# EAGLE board olhos_5V_reduzido (EAGLE 9.6.2)
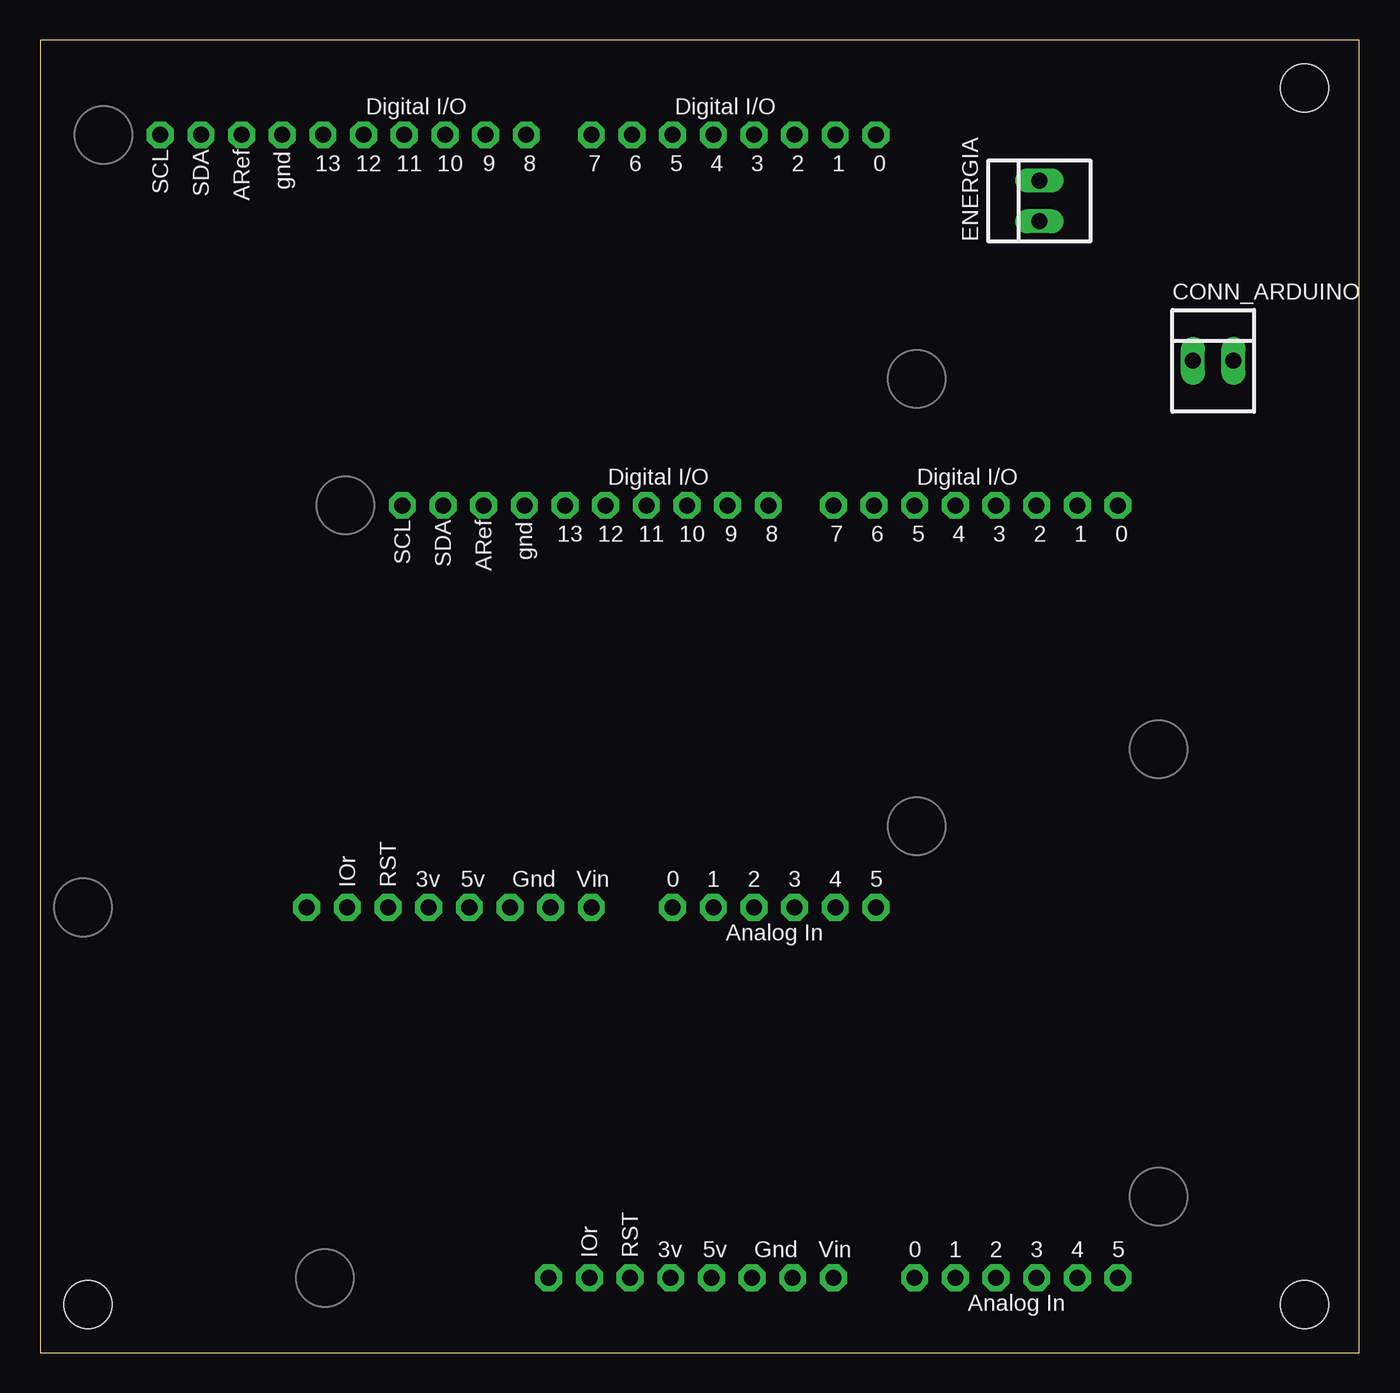
[diagram p0: board, top side]
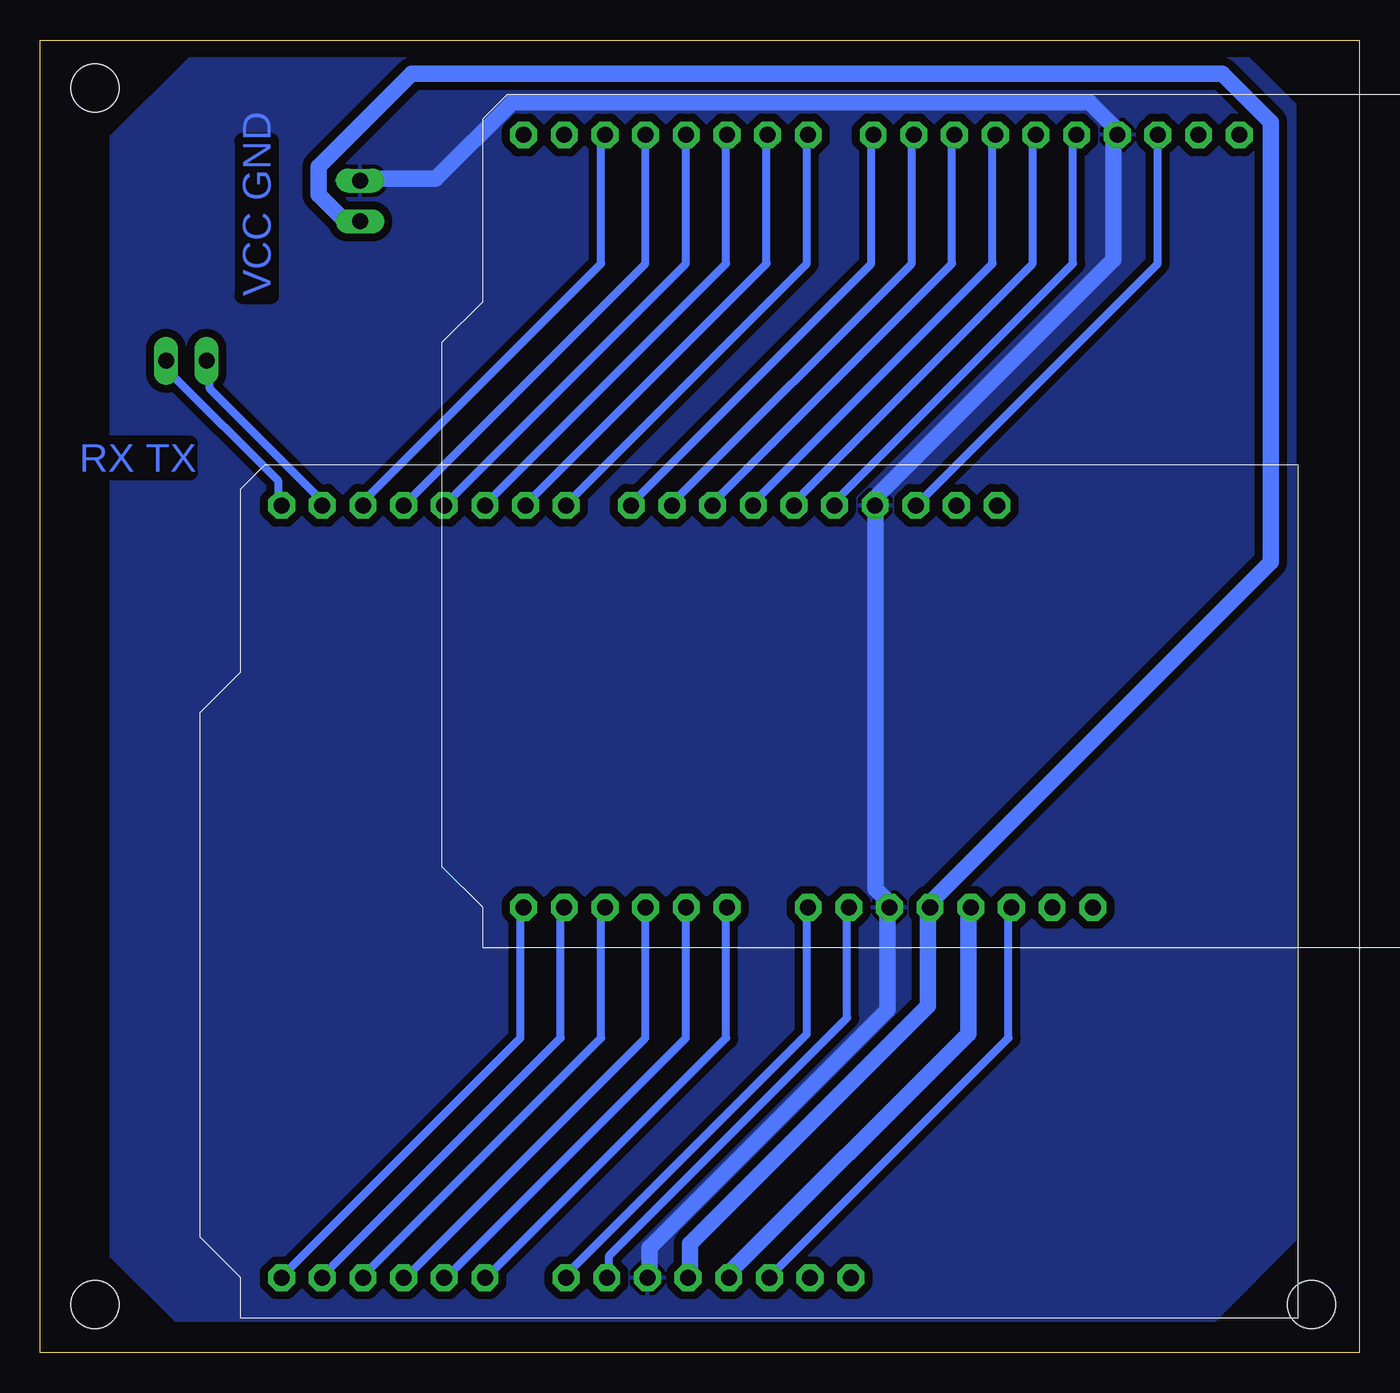
[diagram p1: board, bottom side, seen from below]

Size 82.43 x 82 mm. Coordinates in mm from the lower left corner, seen from the top.
Outline: 0,0 82.43,0 82.43,82 0,82 0,0
Copper layers (1*16): Top 0.035mm / dielectric 1.5mm / Bottom 0.035mm
Design rules "default": minimum track width 6mil, minimum drill 0.35mm, track to track 6mil, track to pad 6mil, pad to pad 6mil, via to via 6mil, smd to smd 6mil, copper to edge 40mil, drill to drill 6mil, minimum pad ring 10mil, minimum via ring 8mil, stop-mask expansion 4mil, vias tented up to drill 0mil, thermal gap 10mil
Net classes: 0 default: width 0.508 mm, clearance 0.5 mm; 1 ENERGIA: width 1.016 mm, clearance 0.5 mm
Holes 3 mm at 3,3 79,3 79,79

## Footprints (pad centres in the part's own frame; a part is rotated, then mirrored left to right if it is on the bottom)
22-23-2021 = drill 1 long: 1 -1.27,0; 2 1.27,0
ARDUINOR3-BPLACE = drill 1 pad 1.676 octagon: 3V 35.56,2.54; 5V 38.1,2.54; A0 50.8,2.54; A1 53.34,2.54; A2 55.88,2.54; A3 58.42,2.54; A4 60.96,2.54; A5 63.5,2.54; AREF 23.876,50.8; D0 63.5,50.8; D1 60.96,50.8; D2 58.42,50.8; D3 55.88,50.8; D4 53.34,50.8; D5 50.8,50.8; D6 48.26,50.8; D7 45.72,50.8; D8 41.656,50.8; D9 39.116,50.8; D10 36.576,50.8; D11 34.036,50.8; D12 31.496,50.8; D13 28.956,50.8; GND 26.416,50.8; GND1 43.18,2.54; GND2 40.64,2.54; IOREF 30.48,2.54; RESERVED 27.94,2.54; RESET 33.02,2.54; SCL 18.796,50.8; SDA 21.336,50.8; VIN 45.72,2.54

## Placement (x,y rotation side)
CONN_ARDUINO  22-23-2021  [22-23-2021]  73.29,61.96 0 top
ENERGIA  22-23-2021  [22-23-2021]  62.43,71.95 90 top
TELA_LCD  ARDUINOR3-BPLACE  [ARDUINOR3-BPLACE]  -11.28,25.27 0 top
U2  ARDUINOR3-BPLACE  [ARDUINOR3-BPLACE]  3.84,2.13 0 top

## Library data of the parts
CONN_ARDUINO ENERGIA = con-molex; MF: MOLEX; MPN: 22-23-2021; OC_FARNELL: 1462926; OC_NEWARK: 25C3832
TELA_LCD U2 = adafruit

## Nets
3V [ENERGIA]: TELA_LCD.3V U2.3V
A0: TELA_LCD.A0 U2.A0
A1: TELA_LCD.A1 U2.A1
A2: TELA_LCD.A2 U2.A2
A3: TELA_LCD.A3 U2.A3
A4: TELA_LCD.A4 U2.A4
A5: TELA_LCD.A5 U2.A5
GND [ENERGIA]: ENERGIA.2 TELA_LCD.GND TELA_LCD.GND2 U2.GND U2.GND2
GND1: TELA_LCD.GND1 U2.GND1
N$1: TELA_LCD.D2 U2.D2
N$2: TELA_LCD.D3 U2.D3
N$3: TELA_LCD.D4 U2.D4
N$4: TELA_LCD.D5 U2.D5
N$5: TELA_LCD.D6 U2.D6
N$6: TELA_LCD.D7 U2.D7
N$7: TELA_LCD.D8 U2.D8
N$8: TELA_LCD.D9 U2.D9
N$9: TELA_LCD.D10 U2.D10
N$10: TELA_LCD.D11 U2.D11
N$11: TELA_LCD.D12 U2.D12
N$12: TELA_LCD.D13 U2.D13
N$14: TELA_LCD.AREF U2.AREF
RESET: TELA_LCD.RESET U2.RESET
RX: CONN_ARDUINO.2 U2.D0
TX: CONN_ARDUINO.1 U2.D1
VCC [ENERGIA]: ENERGIA.1 TELA_LCD.5V U2.5V
VIN: TELA_LCD.VIN U2.VIN

## Tracks (layer width: path | path; a pad name or v marks a point on that pad's centre or on a via)
3V
  Bottom 1.016: TELA_LCD.3V 24.44,27.72 24.44,19.91 39.56,4.79 U2.3V
A0
  Bottom 0.508: TELA_LCD.A0 39.56,27.72 39.56,19.66 54.43,4.79 U2.A0
A1
  Bottom 0.508: TELA_LCD.A1 42.08,27.72 42.08,19.66 56.95,4.79 U2.A1
A2
  Bottom 0.508: TELA_LCD.A2 44.6,27.72 44.6,19.66 59.47,4.79 U2.A2
A3
  Bottom 0.508: TELA_LCD.A3 47.38,27.72 47.38,19.66 62.24,4.79 U2.A3
A4
  Bottom 0.508: TELA_LCD.A4 49.9,27.72 49.9,19.66 64.76,4.79 U2.A4
A5
  Bottom 0.508: TELA_LCD.A5 52.42,27.72 52.42,19.66 67.28,4.79 U2.A5
GND
  Bottom 1.016: ENERGIA.2 62.24,73.33 57.71,73.33 52.92,78.12 16.88,78.12 15.37,76.61 15.37,76.1 TELA_LCD.GND 15.37,75.6 15.37,68.29 30.24,53.42 U2.GND 30.24,52.92 30.24,28.98 29.48,28.22 TELA_LCD.GND2 29.48,27.72 29.48,21.42 44.35,6.55 44.35,4.79 U2.GND2
  pour Bottom: 9,2 4,7 4,78 6,80 7,81 73,81 78,76 78,6 74,2
GND1
  Bottom 0.508: TELA_LCD.GND1 32,27.72 32,20.92 46.87,6.05 46.87,4.79 U2.GND1
N$1
  Bottom 0.508: TELA_LCD.D2 47.38,75.85 47.38,68.04 62.24,53.17 U2.D2
N$2
  Bottom 0.508: TELA_LCD.D3 44.6,75.85 44.6,68.04 59.47,53.17 U2.D3
N$3
  Bottom 0.508: TELA_LCD.D4 42.08,75.85 42.08,68.04 56.95,53.17 U2.D4
N$4
  Bottom 0.508: TELA_LCD.D5 39.56,75.85 39.56,68.04 54.43,53.17 U2.D5
N$5
  Bottom 0.508: TELA_LCD.D6 37.04,75.85 37.04,68.04 51.91,53.17 U2.D6
N$6
  Bottom 0.508: TELA_LCD.D7 34.52,75.85 34.52,68.04 49.39,53.17 U2.D7
N$7
  Bottom 0.508: TELA_LCD.D8 30.49,75.85 30.49,68.04 45.36,53.17 U2.D8
N$8
  Bottom 0.508: TELA_LCD.D9 27.97,75.85 27.97,68.04 42.84,53.17 U2.D9
N$9
  Bottom 0.508: TELA_LCD.D10 25.45,75.85 25.45,68.04 40.32,53.17 U2.D10
N$10
  Bottom 0.508: TELA_LCD.D11 22.93,75.85 22.93,68.04 37.8,53.17 U2.D11
N$11
  Bottom 0.508: TELA_LCD.D12 20.41,75.85 20.41,68.04 35.28,53.17 U2.D12
N$12
  Bottom 0.508: TELA_LCD.D13 17.89,75.85 17.89,68.04 32.76,53.17 U2.D13
N$14
  Bottom 0.508: TELA_LCD.AREF 12.6,75.85 12.6,68.04 27.47,53.17 U2.AREF
RESET
  Bottom 0.508: TELA_LCD.RESET 21.92,27.72 21.92,19.66 36.79,4.79 U2.RESET
RX
  Bottom 0.508: CONN_ARDUINO.2 74.34,61.74 74.34,61.24 67.54,54.43 67.54,53.17 U2.D0
TX
  Bottom 0.508: CONN_ARDUINO.1 71.82,61.74 71.82,60.23 64.76,53.17 U2.D1
VCC
  Bottom 1.016: ENERGIA.1 62.5,70.81 63.5,70.81 65.02,72.32 65.02,74.09 59.22,79.88 8.57,79.88 5.54,76.86 5.54,49.39 26.96,27.97 TELA_LCD.5V 26.96,27.47 26.96,21.67 41.83,6.8 41.83,4.79 U2.5V
VIN
  Bottom 0.508: TELA_LCD.VIN 34.52,27.72 34.52,19.91 49.64,4.79 U2.VIN

## Text on the board
Bottom: VCC GND | RX TX